# Altium PCB Beetech Metro Shield 1.1.PcbDoc
Units mm, origin at the board's own origin, x right, y up, seen from the top; angles counter-clockwise.
Board outline 68 x 53.53 mm, 2 copper layers (Top Layer, Bottom Layer), stack 1.671 mm thick; 29 components, 25 nets, 125 pads, 27 vias.
Unrouted connection lines stored in the file: 80.
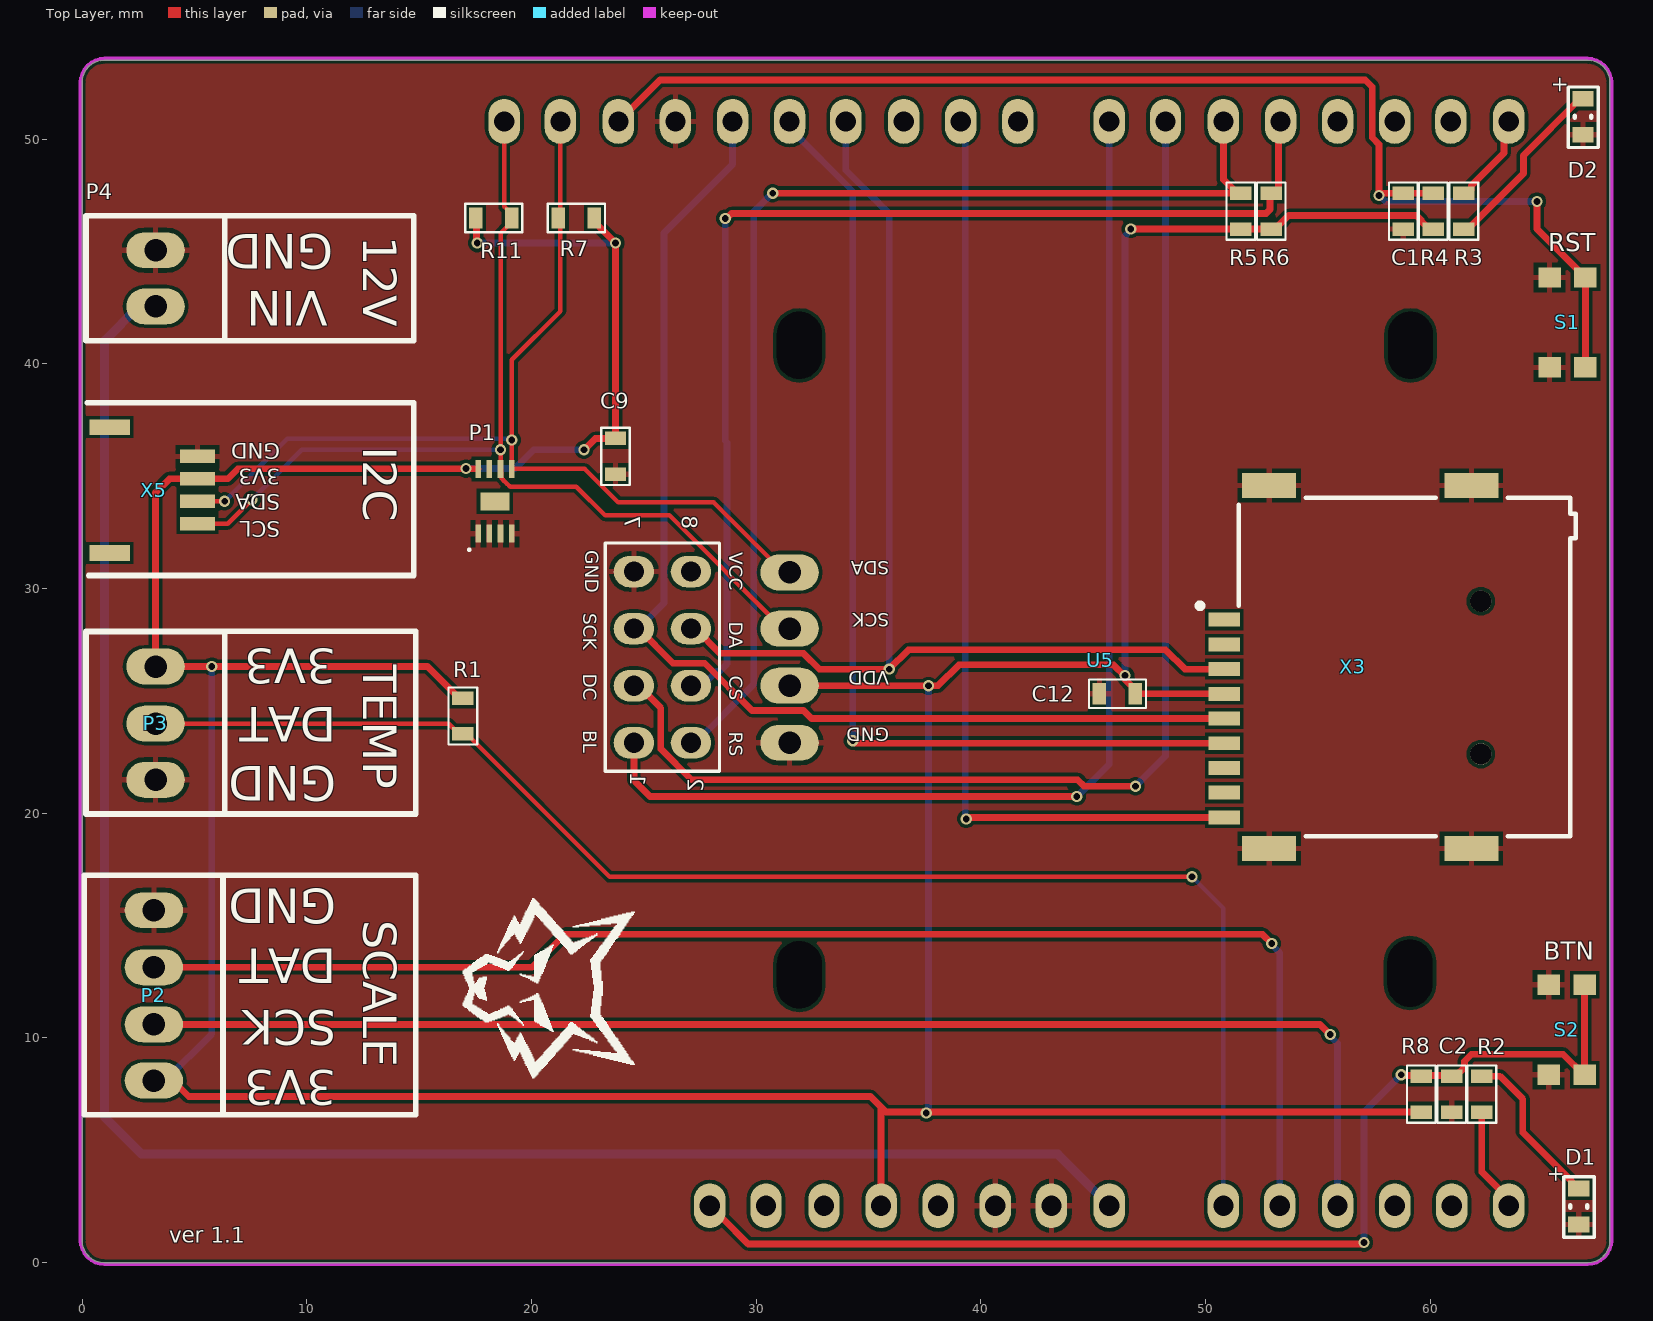
[diagram p0: Top Layer view]
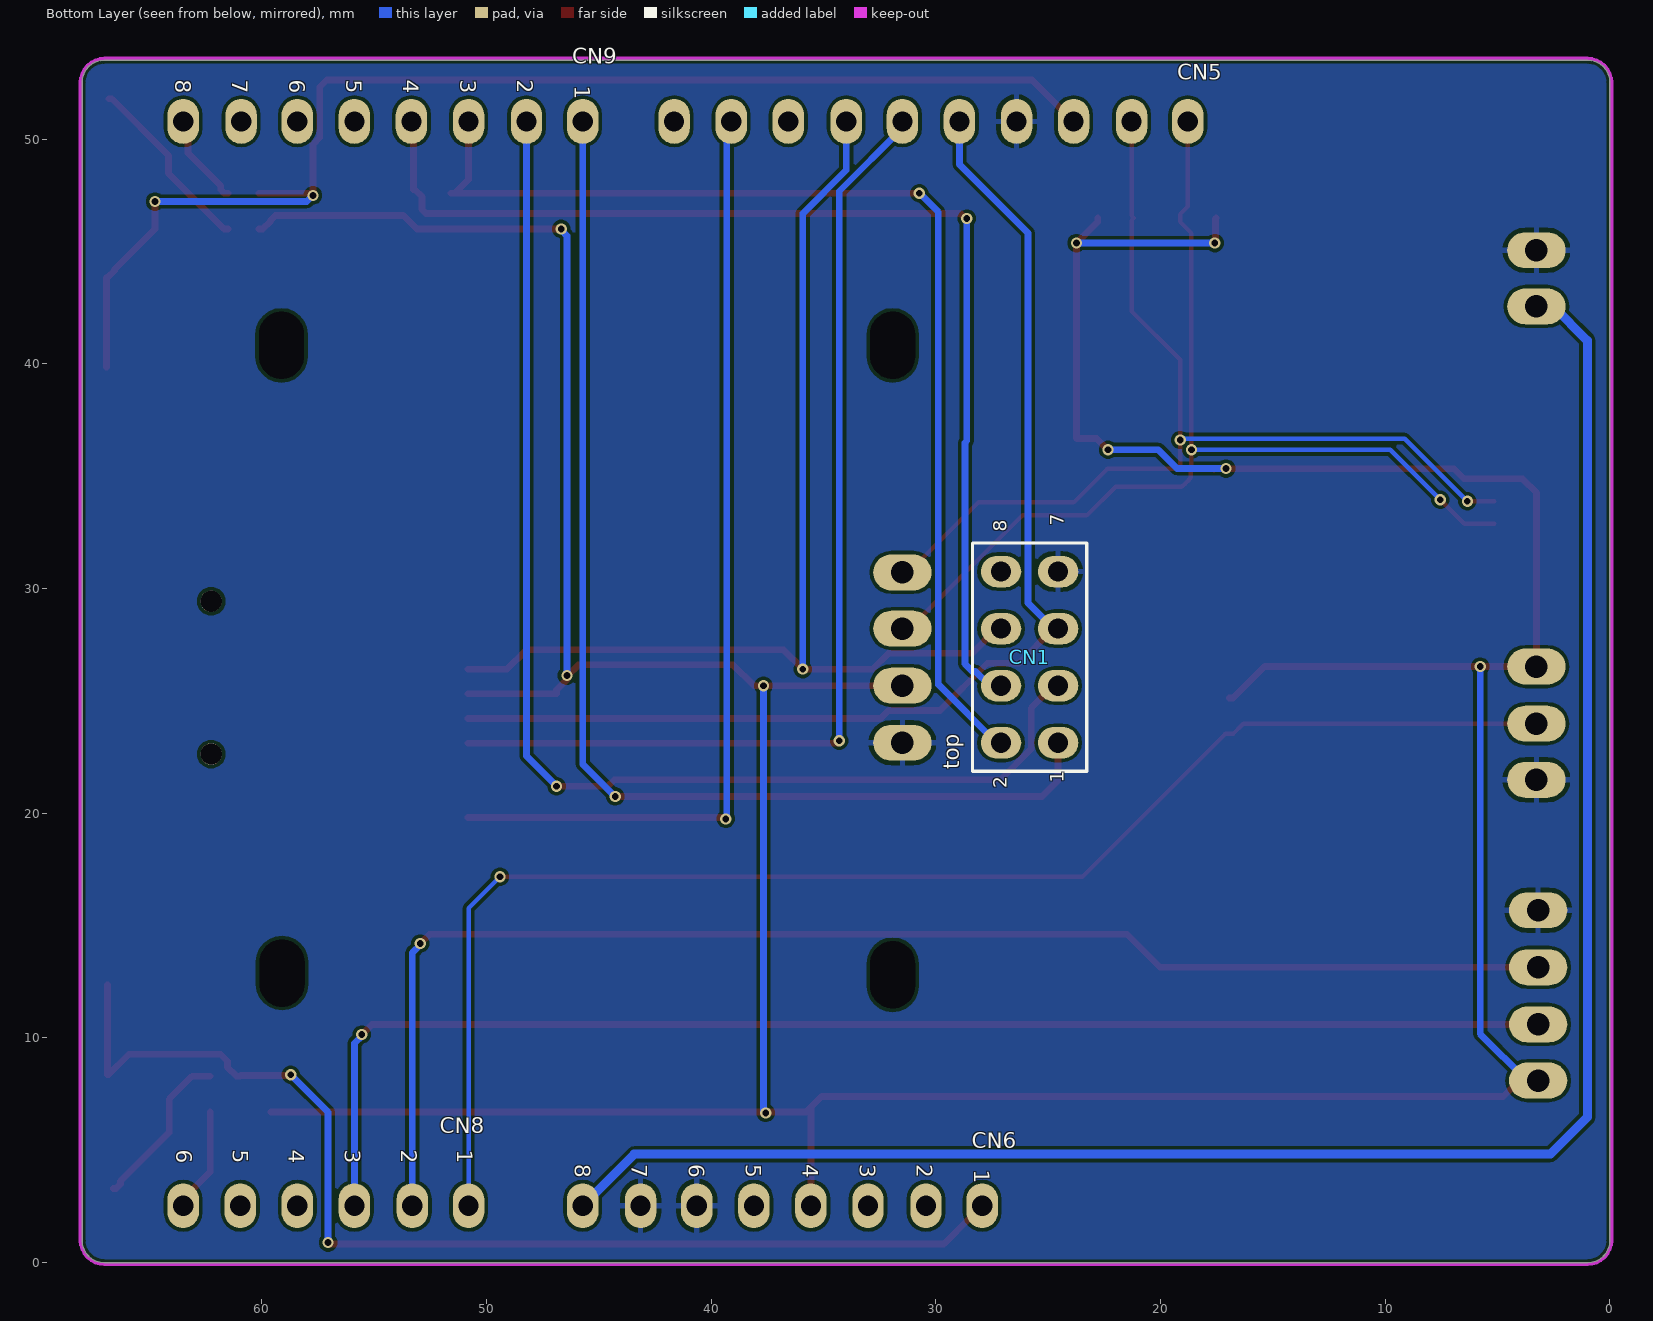
[diagram p1: Bottom Layer view, seen from below]
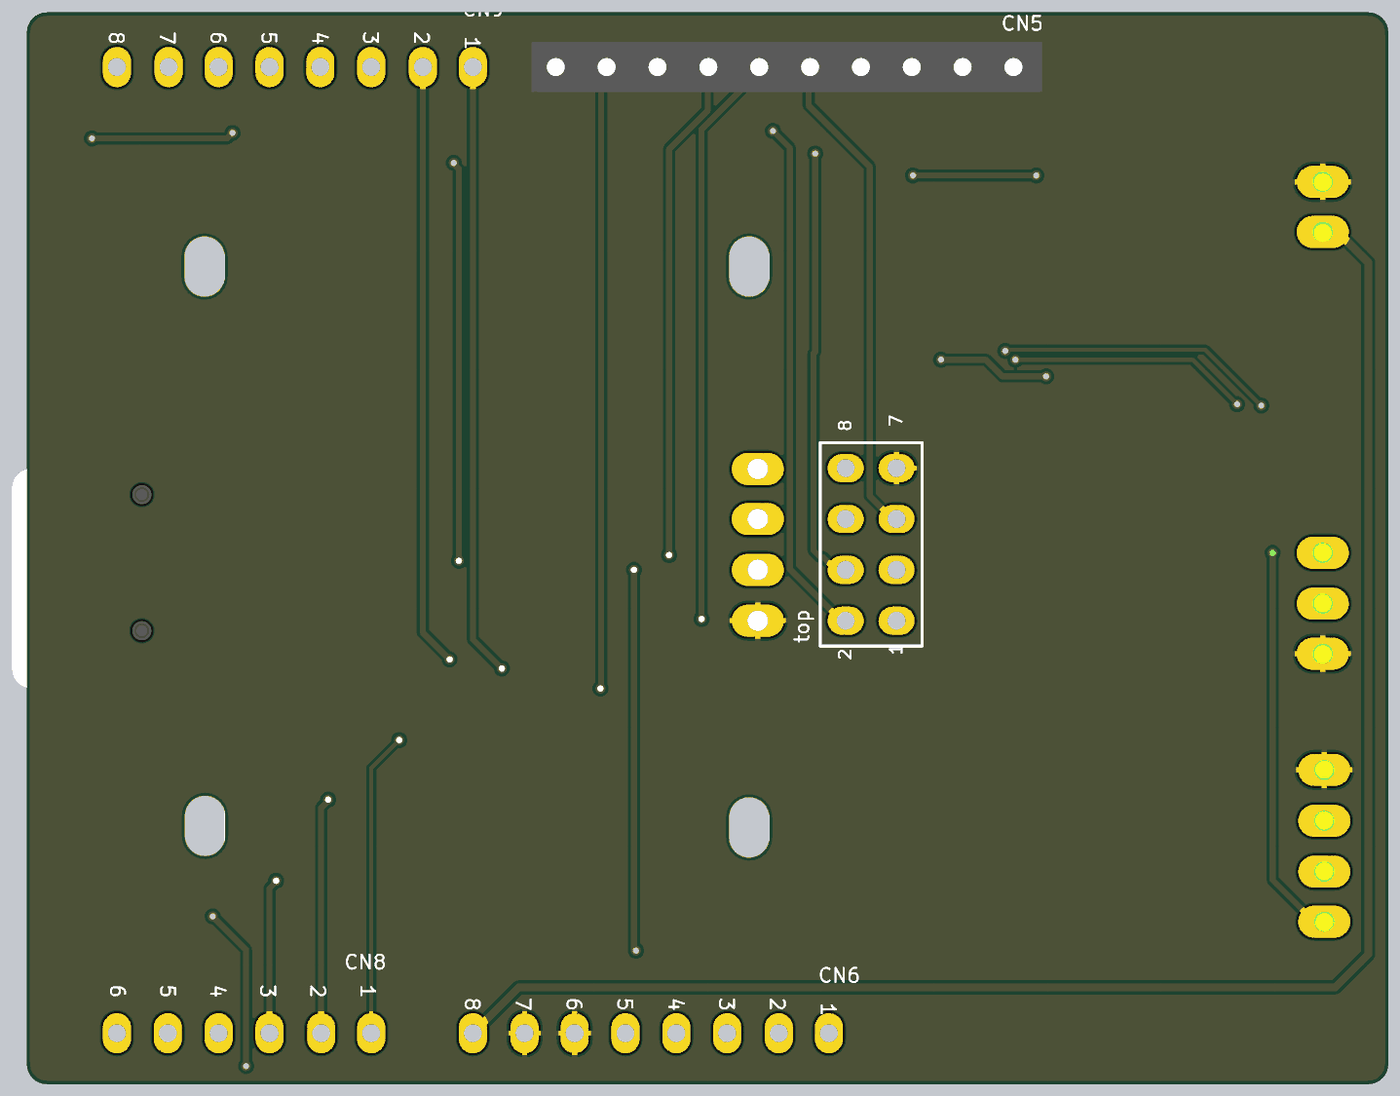
[diagram p2: 3D render of the assembled board from below, using the file's embedded part models]

## Layer stack, top to bottom
Top Solder: solder mask 0.0102, Solder Resist, Dk 3.5
Top Layer: signal copper 0.0356
Dielectric1: core 1.6, FR-4, Dk 4.8
Bottom Layer: signal copper 0.0356
Bottom Solder: solder mask 0.0102, Solder Resist, Dk 3.5

## Board outline
67,53.522 1,53.522 0.805,53.503 0.617,53.446 0.444,53.354 0.293,53.229 0.169,53.078 0.076,52.905 0.019,52.717 0,52.522 0,0.992 0.019,0.797 0.076,0.61 0.169,0.437 0.293,0.285 0.444,0.161 0.617,0.068 0.805,0.012 1,-0.008 67,-0.008 67.195,0.012 67.383,0.068 67.556,0.161 67.707,0.285 67.831,0.437 67.924,0.61 67.981,0.797 68,0.992 68,52.522 67.981,52.717 67.924,52.905 67.831,53.078 67.707,53.229 67.556,53.354 67.383,53.446 67.195,53.503

## Design rules (kind name [scope] priority, off if disabled: settings)
Clearance [All] p1: gap=0.15 ignorepadtopadclearanceinfootprint=FALSE
ComponentClearance [All] p1: gap=0 collisioncheckmode=3 verticalgap=0 showdistances=FALSE
FabricationTestPointUsage [All] p1 off: valid=0 allowmultiple=FALSE
FabricationTestpoint [All] p1 off: side=3 testpointundercomponent=TRUE minsize=1.016 maxsize=2.54 preferedsize=1.524 minholesize=0 maxholesize=1.016 preferedholesize=0.813 testpointgrid=0.025 allowsidetop=TRUE allowsidebottom=TRUE usegrid=TRUE gridtolerance=0
HoleSize [All] p1: absolutevalues=TRUE maxlimit=3.81 minlimit=0.025 maxpercent=80.000 minpercent=20.000
HoleToHoleClearance [All] p1: gap=0 allowstackedmicrovias=TRUE
MinimumSolderMaskSliver [All] p1: minsoldermaskwidth=0
PolygonConnect [InNet('VCC 3.3V')] p1: connectstyle=Direct reliefconductorwidth=0.254 reliefentries=4 polygonreliefangle="90 Angle" airgapwidth=0.254
PolygonConnect PolygonConnect_1 [InNet('GND')] p2: thpad.connectstyle=Relief thpad.reliefconductorwidth=0.254 thpad.reliefentries=4 thpad.polygonreliefangle="90 Angle" thpad.airgapwidth=0.2 smdpad.connectstyle=Relief smdpad.reliefconductorwidth=0.254 smdpad.reliefentries=4 smdpad.polygonreliefangle="90 Angle" smdpad.airgapwidth=0.2 via.connectstyle=Direct via.reliefconductorwidth=0.254 via.reliefentries=4 via.polygonreliefangle="90 Angle" via.airgapwidth=0.2
RoutingVias [All] p1: holewidth=0.3 width=0.5 viastyle="Through Hole" minholewidth=0.2 minwidth=0.4 maxholewidth=1.2 maxwidth=2 useviatemplates=TRUE viatemplateguid#1={3DB4D02C-F2AA-4D96-93EA-058B72C6274F} viatemplateguid#2={7253A52D-AA54-4A84-B513-F050F2263B0A} viatemplatename#1=v50h30m0mx0 viatemplatename#2=v50h30m50mx0
SilkToSilkClearance [All] p1: silktosilkclearance=0.152
SilkToSolderMaskClearance [IsPad] p1: minsilkscreentomaskgap=0 clearancetoexposedcopper=TRUE
SolderMaskExpansion [All] p1: expansion=0.102 istentingtop=FALSE
SupplyNets "Schematic Supply Nets_7" [InNet('VIN')] p1: voltage=0.000
SupplyNets "Schematic Supply Nets_5" [InNet('3V3')] p2: voltage=0.000
SupplyNets "Schematic Supply Nets" [InNet('GND')] p3: voltage=0.000
Width [All] p1: maxlimit=5.08 minlimit=0.01 preferedwidth=0.305 minimp=50.000000 maximp=50.000000 favimp=50.000000
22 further rules are at their usual default settings.

## Components (designator, comment, footprint, x,y, rotation, side; value= is the part's Value field where it differs from the comment)
C1 "100nF 0603" "CAP 0603 - OUTLINE" 58.8,46.8 r90 top value=100nF
C2 "100nF 0603" "CAP 0603 - OUTLINE" 60.96,7.5 r90 top value=100nF
C9 "10uF 0603" "CAP 0603 - OUTLINE" 23.739,35.884 r90 top value=10uF
C12 "10uF 0603" "CAP 0603 - OUTLINE" 46.082,25.315 r0 top value=10uF
CN1 "4 X 2  Header" "4 x 2 2.54mm - no Connector" 24.56,23.138 r90 bottom
CN5 "10-Pin Stiftleiste 10x1 2.54 Low Profile" "10PIN - III" 18.79,50.792 r270 bottom locked
CN6 "8-Pin Stiftleiste 8x1 2.54 Low Profile" "8 PIN - Stiftleiste" 27.94,2.532 r270 bottom locked
CN8 "6-PiN" 6PIN 50.8,2.532 r270 bottom locked
CN9 "8-Pin Stiftleiste 8x1 2.54 Low Profile" "8 PIN - Stiftleiste" 45.72,50.792 r270 bottom locked
D1 "LED Diode SMD LOW CURRENT" "LED SMD 0603 FOOTPRINT" 66.611,2.5 r270 top
D2 "LED Diode SMD LOW CURRENT" "LED SMD 0603 FOOTPRINT" 66.8,51 r270 top
P1 "EEPROM CAT24C512HU5IGT3" "UDFN8 3.0x2.0 CAT24C512HU5IGT3" 18.375,33.884 r90 top
P2 "4-Pin Right Angle Housing" "4PIN - RND 205-EK254-2.54-04P" 3.195,8.104 r180 top
P3 "3-Pin Right Angle Housing" "3PIN - RND 205-EK254-2.54-03P" 3.271,21.49 r180 top
P4 "2-Pin Right Angle Housing" "2PIN - RND 205-EK254-2.54-02P" 3.271,42.558 r180 top
R1 "4.7k Ohm 0603" "RES 0603 FOOTPRINT - OUTLINE" 16.948,24.329 r90 top value=4.7k
R2 "330 Ohm 0603" "RES 0603 FOOTPRINT - OUTLINE" 62.3,7.5 r270 top value=330
R3 "750 Ohm 0603" "RES 0603 FOOTPRINT - OUTLINE" 61.5,46.8 r90 top value=750
R4 "47k Ohm 0603" "RES 0603 FOOTPRINT - OUTLINE" 60.137,46.8 r90 top value=47k
R5 "47k Ohm 0603" "RES 0603 FOOTPRINT - OUTLINE" 51.575,46.8 r270 top value=47k
R6 "47k Ohm 0603" "RES 0603 FOOTPRINT - OUTLINE" 52.925,46.8 r270 top value=47k
R7 "10k Ohm 0603" "RES 0603 FOOTPRINT - OUTLINE" 22,46.493 r0 top value=10k
R8 "47k Ohm 0603" "RES 0603 FOOTPRINT - OUTLINE" 59.6,7.5 r90 top value=47k
R11 "10k Ohm 0603" "RES 0603 FOOTPRINT - OUTLINE" 18.325,46.493 r180 top value=10k
S1 "Taster Print_SMD_2" "Taster Print - SMD - KMR241G LFS" 66.111,41.846 r90 top
S2 "Taster Print_SMD_2" "Taster Print - SMD - KMR241G LFS" 66.073,10.366 r90 top
U5 "OLED I2C 1.3 128x64" "OLED 1.3 128x64 I2C" 31.49,30.718 r0 top locked
X3 "SD micro Card Holder_3" "SD CARD HOLDER - MICRO - 3 - SD CARD INSERTED" 62.255,26.035 r90 top locked
X5 "4-Pin" "QWIIC JST CONNECTOR - SMD 4-PIN" 5.139,34.384 r270 top

## Footprints (in the part's own frame and the unit in brackets; to place one, negate y for a bottom-side part, rotate by r counter-clockwise, add the part's x,y. Pads: shape width x height; smd on the part's side, far side on the other; paste and mask are expansions set on the pad)
"2PIN - RND 205-EK254-2.54-02P" [mm] "RND 205-EK254-2.54-02P"
  oval 2.6x1.6 hole 1: 1(0,0) 2(0,-2.5)
  silkscreen extent -3.07,-4.04 3.1,1.52, body extent -3.1,-3.99 3.1,1.55, height 8.51
"3PIN - RND 205-EK254-2.54-03P" [mm] "RND 205-EK254-2.54-03P"
  oval 2.6x1.6 hole 1: 1(0,0) 2(0,-2.5) 3(0,-5.04)
  silkscreen extent -3.07,-6.6 3.1,1.52, body extent -3.1,-6.55 3.1,1.53, height 8.51
"4 x 2 2.54mm - no Connector" [mm] "4 x 2 2.54mm"
  oval 1.4x1.8 hole 0.9: 1(0,0) 2(0,2.54) 3(2.54,0) 4(2.54,2.54) 5(5.08,0) 6(5.08,2.54) 7(7.62,0) 8(7.62,2.54)
  silkscreen extent -1.27,-1.27 8.89,3.81
"4PIN - RND 205-EK254-2.54-04P" [mm] "RND 205-EK254-2.54-04P"
  oval 2.6x1.6 hole 1: 1(0,0) 2(0,-2.5) 3(0,-5.04) 4(0,-7.58)
  silkscreen extent -3.07,-9.14 3.1,1.52, body extent -3.1,-9.1 3.1,1.52, height 8.51
6PIN [mm]
  oval 2x1.4 hole 0.9: 1(0,0) 2(0,-2.5) 3(0,-5.08) 4(0,-7.62) 5(0,-10.16) 6(0,-12.7)
"8 PIN - Stiftleiste" [mm] "2212S-08SG-85 -  Board-to-Board-Steckve61300811021 -  Board-to-Board-Steckverbinder, abgewinkelt, 2.54 mm, 8 Kontakt(e), Stiftleiste, Baureihe WR-PHD rbinder, 2.54 mm, 8 Kontakt(e), Buchse, Baureihe 2212S, Durchsteckmontage"
  oval 2x1.4 hole 0.9: 1(0,0) 2(0,-2.5) 3(0,-5.08) 4(0,-7.62) 5(0,-10.16) 6(0,-12.7) 7(0,-15.2) 8(0,-17.78)
  body extent -1.25,-18.99 1.25,1.51, height 8
"10PIN - III" [mm]
  oval 2x1.4 hole 0.9: 1(0,0) 2(0,-2.5) 3(0,-5.08) 4(0,-7.62) 5(0,-10.16) 6(0,-12.7) 7(0,-15.2) 8(0,-17.78) 9(0,-20.32) 10(0,-22.86)
  body extent -1.25,-24 1.25,1.5, height 8
"CAP 0603 - OUTLINE" [mm] "CAP 0603"
  rect 0.6x0.95 smd: 1(-0.8,0) 2(0.8,0)
  silkscreen extent -1.27,-0.64 1.27,0.64, body extent -0.8,-0.4 0.8,0.4, height 0.8
"LED SMD 0603 FOOTPRINT" [mm] "Chip Diode, 2-Leads, Body 1.60x0.80mm, IPC Medium Density"
  rect 0.7x0.95 smd: 1(-0.8,0) 2(0.8,0)
  silkscreen extent -1.32,-0.66 1.37,0.69, body extent -0.8,-0.4 0.8,0.4, height 0.35
"OLED 1.3 128x64 I2C" [mm] "OLED 1.3 128x64 I2C"
  oval 2.6x1.6 hole 1: 1(0,-7.58) 2(0,-5.04) 3(0,-2.5) 4(0,0)
  rrect50% 1x1 hole 2 slot 3 at 90 deg: 5(0.432,10.109) 6(27.635,10.109) 7(27.61,-17.831) 8(0.432,-17.907)
  body extent -1.45,-21.64 29.55,13.86, height 8.6
"QWIIC JST CONNECTOR - SMD 4-PIN" [mm] "QWIIC JST CONNECTOR - SMD 4-PIN"
  rect 0.7x1.8 smd: 0(-2.8,-3.9) 0(2.8,-3.9)
  rect 0.6x1.55 smd: 1(1.5,0) 2(0.5,0) 3(-0.5,0) 4(-1.5,0)
  body extent -3.03,-4.73 2.97,0.22, height 2.96
"RES 0603 FOOTPRINT - OUTLINE" [mm] "RES 0603 FOOTPRINT"
  rect 0.6x0.95 smd: 1(-0.8,0) 2(0.8,0)
  silkscreen extent -1.27,-0.64 1.27,0.64, body extent -0.8,-0.4 0.8,0.4, height 0.8
"SD CARD HOLDER - MICRO - 3 - SD CARD INSERTED" [mm] "micro SD Card holder, Molex Part Number:    / MEM2075-00-140-01-A"
  rect 0.62x1.4 smd: 1(2.58,11.42) 2(1.48,11.42) 3(0.38,11.42) 4(-0.72,11.42) 5(-1.82,11.42) 6(-2.92,11.42) 7(-4.02,11.42) 8(-5.12,11.42) 10(-6.22,11.42)
  rect 1.1x2.4 smd: 20(-7.6,0.42) 20(-7.6,9.42) 20(8.55,0.42) 20(8.55,9.42)
  round 0.95 hole 0.95 unplated: ""(-3.4,0) ""(3.4,0)
  silkscreen extent -7.05,-4.23 8,12.62, body extent -7.74,-6.5 8.7,11.6, height 1.46
"Taster Print - SMD - KMR241G LFS" [mm] "http://ch.farnell.com/c-k-components/kmr241g-lfs/taster-smd-4n/dp/1437637"
  rect 0.9x1 smd: 1(-2,0.8) 2(-2,-0.8) 10(2,0.8) 20(2,-0.8)
  body extent -2.3,-1.4 2.3,1.4, height 1.93
"UDFN8 3.0x2.0 CAT24C512HU5IGT3" [mm] "CAT24C512HU5IGT3"
  rect 0.8x0.25 smd: 1(-1.44,0.75) 2(-1.44,0.25) 3(-1.44,-0.25) 4(-1.44,-0.75) 5(1.44,-0.75) 6(1.44,-0.25) 7(1.44,0.25) 8(1.44,0.75)
  rect 0.8x1.3 smd: 9(0,0)
  silkscreen extent -2.21,1.09 -2.11,1.19, body extent -1.5,-1 1.5,1, height 0.55

## Part data
C1 C2 C9 C12: "C CERAMIC SMD", Bezeichnung="C SMD", Haendler=Mouser, housing/footprint=0603, Umax=10V
  C1 C2: Haendler Nr=710-885012206020, Hersteller=Würth, Hersteller Nr=885012206020, Preis (CHF)=0.05
  C9 C12: Dielektrikum=X5R, Haendler Nr=810-C1608X5R1A106K, Hersteller=TDK, Hersteller Nr=C1608X5R1A106K080AC, Preis (CHF)=0.5
CN5: "Low Profile 10-Pin Stiftleiste 10x1 2.54 Low Profile", Haendler=Mouser, Haendler Nr=200-TLW11006GS, Hersteller=Samtec, Hersteller Nr=TLW-110-06-G-S, Preis (CHF)=2.2
CN6 CN9: "Low Profile 8-Pin Stiftleiste 8x1 2.54", Haendler=Mouser, Haendler2=Farnell, Haendler2 Nr=2856894, Haendler Nr=200-TLW10806TS, link=https://www.mouser.ch/Connectors/Headers-Wire-Housings/_/N-ay0lo?P=1ytkls2&Keyword=tlw-108&FS=True, Preis (CHF)=1.06
CN8: "6-Pin", LatestRevisionDate=17-Jul-2002, LatestRevisionNote="Re-released for DXP Platform.", Publisher="Altium Limited"
D1: library part "LED Diode SMD - GREEN - 0603 - 2mA_1", "LED Green APT1608LZGCK", COLOR=GREEN, Forward Voltage=2.65, Haendler=Mouser, Haendler Nr=604-APT1608LZGCK, Hersteller=Knightbright, Hersteller Nr=APT1608LZGCK, If=2mA, link=http://ch.farnell.com/kingbright/kpt-1608lvzgck/led-gr-n-50mcd-525nm-smd/dp/2610409, Preis (CHF)=0.321
D2: library part "LED Diode SMD - RED - 0603 - 2mA_1", "LED Red APT1608LSECKJ3RV", COLOR=RED, Forward Voltage=1.8V, Haendler=Mouser, Haendler Nr=604-APT1608LSECKJ3RV, Hersteller=Knightbright, Hersteller Nr=APT1608LSECKJ3RV, If=2mA, Preis (CHF)=0.6
P2: library part "4-Pin Screw Terminal", "4-Pin", ComponentLink1Description=Mouser, ComponentLink1URL=https://www.mouser.ch/ProductDetail/TE-Connectivity/640453-2?qs=sGAEpiMZZMs%252bGHln7q6pm5E1Eb6qwPl2KIU5TYv3tVY%3d, Haendler=Distrelec, Haendler Nr=301-27-920, Hersteller=RND, Hersteller Nr="RND 205-EK254-2.54-04P", Preis (CHF)=0.60
P3: library part "3-Pin Screw Terminal", "3-Pin", ComponentLink1Description=Mouser, ComponentLink1URL=https://www.mouser.ch/ProductDetail/TE-Connectivity/640453-2?qs=sGAEpiMZZMs%252bGHln7q6pm5E1Eb6qwPl2KIU5TYv3tVY%3d, Haendler=Distrelec, Haendler Nr=301-27-919, Preis (CHF)=0.60
P4: library part "2-Pin Screw Terminal", "2-Pin", ComponentLink1Description=Mouser, ComponentLink1URL=https://www.mouser.ch/ProductDetail/TE-Connectivity/640453-2?qs=sGAEpiMZZMs%252bGHln7q6pm5E1Eb6qwPl2KIU5TYv3tVY%3d, Haendler=Distrelec, Haendler Nr=301-27-918, Hersteller="RND 205-EK254-2.54-02P", Preis (CHF)=0.60
R1 R2 R3 R4 R5 R6 R7 R8 R11: "R SMD", Bezeichnung="R SMD", Haendler=Mouser, housing/footprint=0603
  R1: Haendler Nr=755-ESR03EZPF4701, Preis (CHF)=0.01
  R2: Haendler Nr=603-RC0603FR-07330RL, Hersteller=YAGEO, Hersteller Nr=RC0603FR-07330RL, Preis (CHF)=0.01
  R3: Haendler2=Farnell, Haendler2 Nr=2059597, Haendler Nr=71-CRCW0603750RFKEAH, Hersteller=Panasonic, Preis (CHF)=0.0123
  R4 R5 R6 R8: Haendler Nr=603-AC0603FR-0747KL, Hersteller=Yageo, Hersteller Nr=AC0603FR-0747KL, Preis (CHF)=0.01
  R7 R11: Haendler Nr=603-AC0603FR-0710KL, Hersteller=Yageo, Hersteller Nr=AC0603FR-0710KL, Preis (CHF)=0.01
S1 S2: "Taster", Haendler=Mouser, Haendler2=Farnell, Haendler2 Nr=1437637, Haendler Nr=611-KMR241GLFS, Hersteller=C&K, Hersteller Nr="KMR241G LFS", link=http://ch.farnell.com/c-k-components/kmr241g-lfs/taster-smd-4n/dp/1437637, Link Hersteller=http://www.ckswitches.com/products/switches/product-details/Tactile/KMR2/KMR241NGLFS/, Preis (CHF)=0.5
U5: "SSD1306 I2C", Chip="SSD1306 I2C", Haendler=Aliexpress, Haendler Nr="OLED I2C 128x64", link=https://de.aliexpress.com/item/1005008365029314.html?gatewayAdapt=glo2deu#nav-specification, Preis (CHF)=2
X3: "SD micro Card  Holder", Haendler=Mouser, Haendler2=Digikey, Haendler2 Nr=2073-MEM2075-00-140-01-ATR-ND, Haendler Nr=640-MEM20750014001A, Hersteller=GCT, Hersteller Nr=MEM2075-00-140-01-A, Preis (CHF)=1.6
X5: library part "4-Pin QWIIC JST CONNECTOR - SMD 4_1", "QWIIC JST CONNECTOR - SMD 4-PIN", Haendler=Mouser, Haendler2=Digikey, Haendler2 Nr=455-SM04B-SRSS-TBCT-ND, Haendler2 Nr 2=455-SM04B-SRSS-TBCT-ND, Haendler Nr=306-SM04BSRSSTBLFSN, Hersteller=Molex, Hersteller Nr=SM04B-SRSS-TB, link=https://cdn-learn.adafruit.com/downloads/pdf/introducing-adafruit-stemma-qt.pdf?timestamp=1629187570, Preis (CHF)=0.5
CN1: Haendler=Mouser, Haendler Nr=200-SSQ10403TD, Hersteller=Samtec, Hersteller Nr=SSQ-104-03-T-D, Preis (CHF)=1.5
P1: Datasheet=https://www.mouser.ch/ProductDetail/onsemi/CAT24C512HU5IGT3?qs=5C9Q4QJFsuOiuCBGwG%2FnpA%3D%3D, Haendler=Mouser, Haendler Nr=863-CAT24C512HU5IGT3, Hersteller="ON SEMICONDUCTOR", Hersteller Nr=CAT24C512HU5IGT3, Preis (CHF)=0.8

## Via types
v1: diameter 0.5, hole 0.3, Top Layer to Bottom Layer, tented both sides, 27 vias

## Nets (pads, with @x,y where several pads share a name; then routed paths per layer and width w, separated by ;. In a path a pad name is that pad's centre, name@x,y a point inside that pad or via, vN(x,y) a via of type N, cw(c..) or ccw(c..) an arc to the next point about the centre after c; other vN are vias at no path point)
3V3: C9.2 C12.2 CN6.4 P1.8 P2.1 P3.3 R1.2 R4.1 R5.2 R6.2 R7.2 R8.1 R11.2 U5.2 X3.4 X5.3 | length 216.1
  Top Layer w0.3: P2.1 4.035,8.104 4.749,7.39 35.095,7.39 35.56,6.924 ; v1(5.775,26.53) v1@5.7,26.53 ; R1.2 16.773,25.129 15.373,26.53 v1@5.7,26.53 ; R11.2 17.554,46.464 17.554,45.408 v1(17.583,45.379) ; P1.8 17.616,35.334 6.934,35.334 6.484,34.884 X5.3 3.884,34.884 3.271,34.271 P3.3 v1@5.7,26.53 ; v1(22.335,36.175) 22.844,36.684 C9.2 v1(23.739,45.379) 22.8,46.318 R7.2 ; U5.2 v1(37.675,25.678) 38.1,25.678 39.029,26.607 45.908,26.607 46.383,26.131 v1(46.422,26.131) ; CN6.4 35.56,6.924 ; v1@46.422,25.95 46.882,25.49 C12.2 X3.4 ; v1(46.675,46.007) 46.682,46 R5.2 R6.2 53.1,46 53.7,46.6 59.399,46.6 59.6,46.399 59.6,46.362 59.962,46 R4.1 ; R8.1 35.784,6.7 35.56,6.924
  Bottom Layer w0.3: P2.1 3.695,8.104 5.775,10.184 v1(5.775,26.53) ; v1(17.086,35.343) 19.268,35.343 20.1,36.175 v1(22.335,36.175) ; v1(17.583,45.379) v1(23.739,45.379) ; v1(37.575,6.66) 37.675,6.76 v1(37.675,25.678) ; v1(46.422,26.131) 46.422,45.7 46.675,45.953 v1(46.675,46.007)
BL: CN1.1 CN9.1 | length 52.3
  Top Layer w0.3: CN1.1 24.56,21.465 25.275,20.75 v1(44.275,20.75)
  Bottom Layer w0.3: v1(44.275,20.75) 45.72,22.195 CN9.1
BUTTON: C2.2 CN6.1 R8.2 S2.2 S2.20 | length 51.1
  Top Layer w0.3: CN6.1 CN6.1 28.448,2.022 28.45,2.022 29.647,0.825 56.975,0.825 57.045,0.895 v1(57.05,0.895) ; v1(58.717,8.366) 58.75,8.333 60.927,8.333 C2.2 61.135,8.3 61.525,8.69 61.525,8.965 61.835,9.275 65.913,9.275 66.823,8.366 S2.2 S2.20
  Bottom Layer w0.3: v1(57.05,0.895) 57.05,6.699 v1(58.717,8.366)
"CARD DETECT": CN5.9 X3.10 | length 42.7
  Top Layer w0.3: v1(39.35,19.75) 39.425,19.75 39.49,19.815 X3.10
  Bottom Layer w0.3: CN5.9 39.312,50.591 39.312,19.788 v1(39.35,19.75)
CS: CN1.4 CN9.4 R6.1 | length 50.4
  Top Layer w0.3: v1(28.624,46.468) 28.678,46.468 28.907,46.697 52.7,46.697 52.875,46.872 52.875,47.45 53.175,47.75 53.25,47.75 53.25,50.702 CN9.4
  Bottom Layer w0.3: CN1.4 27.598,25.678 28.234,26.314 28.37,26.314 28.707,26.651 28.707,36.491 28.624,36.574 v1(28.624,46.468)
D/C: CN1.3 CN9.2 | length 55.4
  Top Layer w0.3: CN1.3 24.76,25.678 25.76,24.678 25.76,22.864 27.134,21.49 44.313,21.49 44.597,21.206 v1(46.882,21.206)
  Bottom Layer w0.3: v1(46.882,21.206) 48.22,22.544 CN9.2
DAT_SCALE: CN8.2 P2.3 | length 62.3
  Top Layer w0.3: P2.3 20.015,13.144 21.482,14.611 52.539,14.611 v1(52.95,14.2)
  Bottom Layer w0.3: v1(52.95,14.2) 52.95,14.146 53.3,13.796 CN8.2
DAT_TEMP: CN8.1 P3.2 R1.1 | length 64.2
  Top Layer w0.2: P3.2 16.313,23.99 16.773,23.529 R1.1 17.123,23.529 23.478,17.175 v1(49.4,17.175)
  Bottom Layer w0.2: v1(49.4,17.175) 50.8,15.775 CN8.1
"ESP32 RESET": C1.2 CN5.3 R4.2 S1.2 S1.20 | length 57.3
  Top Layer w0.3: CN5.3 23.87,50.795 24.378,51.303 24.38,51.303 25.718,52.64 57.11,52.64 57.42,52.33 57.42,50.078 57.725,49.773 v1(57.725,47.5) 57.779,47.5 57.879,47.6 C1.2 R4.2 ; v1(64.75,47.225) 64.75,46.007 66.561,44.196 66.561,44.146 66.861,43.846 S1.20 S1.2
  Bottom Layer w0.3: v1(57.725,47.5) 58,47.225 v1(64.75,47.225)
GND: C1.1 C2.1 C9.1 C12.1 CN1.7 CN5.4 CN6.6 CN6.7 D1.2 D2.2 P1.1 P1.2 P1.3 P1.4 P2.4 P3.1 P4.2 S1.1 S1.10 S2.1 S2.10 U5.1 X3.20 X5.4
"LED 1 G": CN8.6 R2.2 | length 4.7
  Top Layer w0.3: R2.2 62.3,4.032 63.5,2.832 CN8.6
"LED 1 R": CN9.8 R3.2 | length 4.1
  Top Layer w0.3: R3.2 61.675,47.6 61.825,47.75 61.825,47.925 63.29,49.39 63.29,50.582 CN9.8
NetD1_1: D1.1 R2.1 | length 7.3
  Top Layer w0.3: R2.1 63.1,8.3 64.125,7.275 64.125,5.786 66.286,3.625 66.286,3.5 66.486,3.3 D1.1
NetD2_1: D2.1 R3.1 | length 8.2
  Top Layer w0.3: R3.1 61.675,46 64.15,48.475 64.15,49.275 66.675,51.8 D2.1
RES: CN1.2 CN9.3 R5.1 | length 50.5
  Top Layer w0.3: v1(30.736,47.6) R5.1 51.4,47.6 50.8,48.2 CN9.3
  Bottom Layer w0.3: CN1.2 27.3,23.138 29.89,25.728 29.89,46.754 v1(30.736,47.6)
"SCK SCALE": CN8.3 P2.2 | length 60.3
  Top Layer w0.3: P2.2 55.096,10.604 v1(55.55,10.15)
  Bottom Layer w0.3: v1(55.55,10.15) 55.55,10.096 55.88,9.766 CN8.3
SCL: CN5.1 P1.6 R11.1 U5.3 X5.1 | length 46.7
  Top Layer w0.2: X5.1 6.484,32.884 v1(7.55,33.95) ; CN5.1 18.79,47.004 19.125,46.668 R11.1 19.125,46.318 18.625,45.819 v1(18.625,36.175) P1.6 18.65,35.299 18.65,34.935 18.75,34.835 18.75,34.821 18.897,34.674 18.911,34.674 19.051,34.534 21.998,34.534 23.274,33.258 26.144,33.258 31.184,28.218 U5.3
  Bottom Layer w0.2: v1(7.55,33.95) 9.775,36.175 v1(18.625,36.175)
SD_CS: X3.2
SDA: CN5.2 P1.5 R7.1 U5.4 X5.2 | length 45.9
  Top Layer w0.2: X5.2 v1(6.345,33.884) ; CN5.2 21.29,46.583 R7.1 21.29,46.403 21.29,42.35 19.125,40.185 v1(19.125,36.613) P1.5 22.371,35.324 23.862,33.833 28.117,33.833 31.232,30.718 U5.4
  Bottom Layer w0.2: v1(6.345,33.884) 9.136,36.675 19.063,36.675 v1(19.125,36.613)
"SPI CS": CN5.8
"SPI MISO": CN5.6 X3.6 | length 45.3
  Top Layer w0.3: v1(34.3,23.225) 34.41,23.115 X3.6
  Bottom Layer w0.3: CN5.6 31.49,50.492 34.3,47.682 v1(34.3,23.225)
"SPI MOSI": CN1.6 CN5.7 X3.3 | length 50.4
  Top Layer w0.3: CN1.6 27.3,28.218 28.4,27.118 32.106,27.118 32.808,26.415 v1(35.922,26.415) 36.782,27.275 48.22,27.275 49.08,26.415 X3.3
  Bottom Layer w0.3: CN5.7 33.99,48.629 35.922,46.697 v1(35.922,26.415)
"SPI SCK": CN1.5 CN5.5 X3.5 | length 52.4
  Top Layer w0.3: CN1.5 24.76,28.218 26.3,26.678 27.714,26.678 29.814,24.578 32.106,24.578 32.468,24.215 X3.5
  Bottom Layer w0.3: CN1.5 24.76,28.218 25.9,29.358 25.9,45.825 28.95,48.875 CN5.5
VCC: CN1.8
VIN: CN6.8 P4.1 | length 83.8
  Bottom Layer w0.4: P4.1 2.524,42.558 1,41.034 1,6.475 2.65,4.825 43.427,4.825 45.229,3.024 45.258,3.024 45.72,2.562 CN6.8
pads on no net: CN5.10 CN6.2 CN6.3 CN6.5 CN8.4 CN8.5 CN9.5 CN9.6 CN9.7 P1.7 P1.9 U5.5 U5.6 U5.7 U5.8 X3. X3.1 X3.7 X3.8 X5.0

## Polygon pours and split planes (outlines as drawn)
GND on Top Layer "GND_L01_P000" (solid, pour order 0): 67,53.522 1,53.522 0.805,53.503 0.617,53.446 0.444,53.354 0.293,53.229 0.169,53.078 0.076,52.905 0.019,52.717 0,52.522 0,0.992 0.019,0.797 0.076,0.61 0.169,0.437 0.293,0.285 0.444,0.161 0.617,0.068 0.805,0.012 1,-0.008 67,-0.008 67.195,0.012 67.383,0.068 67.556,0.161 67.707,0.285 67.831,0.437 67.924,0.61 67.981,0.797 68,0.992 68,52.522 67.981,52.717 67.924,52.905 67.831,53.078 67.707,53.229 67.556,53.354 67.383,53.446 67.195,53.503
GND on Bottom Layer "GND_L02_P001" (solid, pour order 1): 67,53.522 1,53.522 0.805,53.503 0.617,53.446 0.444,53.354 0.293,53.229 0.169,53.078 0.076,52.905 0.019,52.717 0,52.522 0,0.992 0.019,0.797 0.076,0.61 0.169,0.437 0.293,0.285 0.444,0.161 0.617,0.068 0.805,0.012 1,-0.008 67,-0.008 67.195,0.012 67.383,0.068 67.556,0.161 67.707,0.285 67.831,0.437 67.924,0.61 67.981,0.797 68,0.992 68,52.522 67.981,52.717 67.924,52.905 67.831,53.078 67.707,53.229 67.556,53.354 67.383,53.446 67.195,53.503

## Keep-outs
Keep-Out Layer:
  lines w0.15: -0.075,0.985 cw(c0,0.992) -0.075,0.992 ; -0.075,0.985 cw(c0,0.992) -0.075,0.992 ; -0.075,0.985 -0.055,0.79 ; -0.075,0.992 -0.075,52.522 ; -0.075,52.522 cw(c0,52.522) -0.075,52.53 ; -0.075,52.522 cw(c0,52.522) -0.075,52.53 ; -0.075,52.53 -0.055,52.725 ; -0.055,0.79 ccw(c0.019,0.797) -0.053,0.776 ; -0.055,0.79 ccw(c0.019,0.797) -0.053,0.775 ; -0.055,52.725 cw(c0.019,52.717) -0.053,52.739 ; -0.055,52.725 cw(c0.019,52.717) -0.053,52.739 ; -0.053,0.775 cw(c0.019,0.797) -0.053,0.776 ; -0.053,0.775 -0.053,0.775 ; -0.053,0.775 0.004,0.588 ; -0.053,0.776 -0.053,0.775 ; -0.053,52.739 ccw(c0.019,52.717) -0.053,52.739 ; -0.053,52.739 0.004,52.927 ; -0.053,52.739 -0.053,52.739 ; -0.053,52.739 -0.053,52.739 ; 0.004,0.588 ccw(c0.076,0.61) 0.004,0.588 ; 0.004,0.588 ccw(c0.076,0.61) 0.01,0.574 ; 0.004,0.588 0.004,0.588 ; 0.004,0.588 0.004,0.588 ; 0.004,52.927 cw(c0.076,52.905) 0.004,52.927 ; 0.004,52.927 0.004,52.927 ; 0.004,52.927 cw(c0.076,52.905) 0.01,52.94 ; 0.004,52.927 0.004,52.927 ; 0.004,0.588 ccw(c0.076,0.61) 0.01,0.574 ; 0.004,52.927 cw(c0.076,52.905) 0.01,52.94 ; 0.01,0.574 ccw(c0.076,0.61) 0.01,0.574 ; 0.01,0.574 0.01,0.574 ; 0.01,0.574 0.01,0.574 ; 0.01,0.574 0.102,0.402 ; 0.01,52.941 ccw(c0.076,52.905) 0.01,52.94 ; 0.01,52.941 0.102,53.113 ; 0.01,52.94 0.01,52.941 ; 0.01,52.94 0.01,52.94 ; 0.102,0.401 ccw(c0.169,0.437) 0.111,0.389 ; 0.102,0.402 ccw(c0.169,0.437) 0.102,0.401 ; 0.102,0.401 ccw(c0.169,0.437) 0.111,0.389 ; 0.102,0.402 0.102,0.401 ; 0.102,0.401 0.102,0.401 ; 0.102,53.113 cw(c0.169,53.078) 0.111,53.125 ; 0.102,53.113 cw(c0.169,53.078) 0.102,53.113 ; 0.102,53.113 0.102,53.113 ; 0.102,53.113 0.102,53.113 ; 0.102,53.113 cw(c0.169,53.078) 0.111,53.125 ; 0.111,0.389 0.235,0.238 ; 0.111,53.125 0.235,53.277 ; 0.235,0.238 ccw(c0.293,0.285) 0.245,0.227 ; 0.235,0.238 ccw(c0.293,0.285) 0.245,0.227 ; 0.235,53.277 cw(c0.293,53.229) 0.245,53.287 ; 0.235,53.277 cw(c0.293,53.229) 0.245,53.287 ; 0.245,0.227 0.397,0.103 ; 0.245,53.287 0.397,53.412 ; 0.397,0.103 ccw(c0.444,0.161) 0.409,0.095 ; 0.397,0.103 ccw(c0.444,0.161) 0.409,0.095 ; 0.397,53.412 cw(c0.444,53.354) 0.409,53.42 ; 0.397,53.412 cw(c0.444,53.354) 0.409,53.42 ; 0.409,0.095 cw(c0.444,0.161) 0.409,0.095 ; 0.409,0.095 0.582,0.002 ; 0.409,0.095 0.409,0.095 ; 0.409,0.095 0.409,0.095 ; 0.409,53.42 ccw(c0.444,53.354) 0.409,53.42 ; 0.409,53.42 0.582,53.512 ; 0.409,53.42 0.409,53.42 ; 0.409,53.42 0.409,53.42 ; 0.582,0.002 ccw(c0.617,0.068) 0.596,-0.003 ; 0.582,0.002 ccw(c0.617,0.068) 0.582,0.002 ; 0.582,0.002 ccw(c0.617,0.068) 0.595,-0.003 ; 0.582,0.002 0.582,0.002 ; 0.582,0.002 0.582,0.002 ; 0.582,53.512 cw(c0.617,53.446) 0.595,53.518 ; 0.582,53.512 ccw(c0.617,53.446) 0.582,53.512 ; 0.582,53.512 cw(c0.617,53.446) 0.596,53.518 ; 0.582,53.512 0.582,53.512 ; 0.582,53.512 0.582,53.512 ; 0.595,-0.003 ccw(c0.617,0.068) 0.596,-0.003 ; 0.596,-0.003 0.783,-0.06 ; 0.596,-0.003 0.596,-0.003 ; 0.595,-0.003 0.596,-0.003 ; 0.596,53.518 ccw(c0.617,53.446) 0.595,53.518 ; 0.596,53.518 0.783,53.575 ; 0.596,53.518 0.596,53.518 ; 0.595,53.518 0.596,53.518 ; 0.783,-0.06 ccw(c0.805,0.012) 0.798,-0.063 ; 0.783,-0.06 ccw(c0.805,0.012) 0.783,-0.06 ; 0.783,-0.06 ccw(c0.805,0.012) 0.798,-0.063 ; 0.783,-0.06 0.783,-0.06 ; 0.783,-0.06 0.783,-0.06 ; 0.783,53.575 cw(c0.805,53.503) 0.798,53.578 ; 0.783,53.575 ccw(c0.805,53.503) 0.783,53.575 ; 0.783,53.575 cw(c0.805,53.503) 0.798,53.578 ; 0.783,53.575 0.783,53.575 ; 0.783,53.575 0.783,53.575 ; 0.798,-0.063 0.993,-0.082 ; 0.798,53.578 0.993,53.597 ; 0.993,-0.082 ccw(c1,-0.008) 1,-0.083 ; 0.993,-0.082 ccw(c1,-0.008) 1,-0.083 ; 0.993,53.597 cw(c1,53.522) 1,53.597 ; 0.993,53.597 cw(c1,53.522) 1,53.597 ; 1,-0.083 67,-0.083 ; 1,53.597 67,53.597 ; 67,-0.083 ccw(c67,-0.008) 67.007,-0.082 ; 67,-0.083 ccw(c67,-0.008) 67.007,-0.082 ; 67,53.597 cw(c67,53.522) 67.007,53.597 ; 67,53.597 cw(c67,53.522) 67.007,53.597 ; 67.007,-0.082 67.202,-0.063 ; 67.007,53.597 67.202,53.578 ; 67.202,-0.063 ccw(c67.195,0.012) 67.217,-0.06 ; 67.202,-0.063 ccw(c67.195,0.012) 67.217,-0.06 ; 67.202,53.578 cw(c67.195,53.503) 67.217,53.575 ; 67.202,53.578 cw(c67.195,53.503) 67.217,53.575 ; 67.217,-0.06 ccw(c67.195,0.012) 67.217,-0.06 ; 67.217,-0.06 67.404,-0.003 ; 67.217,-0.06 67.217,-0.06 ; 67.217,-0.06 67.217,-0.06 ; 67.217,53.575 ccw(c67.195,53.503) 67.217,53.575 ; 67.217,53.575 67.404,53.518 ; 67.217,53.575 67.217,53.575 ; 67.217,53.575 67.217,53.575 ; 67.404,-0.003 ccw(c67.383,0.068) 67.405,-0.003 ; 67.404,-0.003 ccw(c67.383,0.068) 67.418,0.002 ; 67.404,-0.003 67.405,-0.003 ; 67.404,-0.003 67.404,-0.003 ; 67.404,53.518 cw(c67.383,53.446) 67.418,53.512 ; 67.404,53.518 cw(c67.383,53.446) 67.405,53.518 ; 67.404,53.518 67.405,53.518 ; 67.404,53.518 67.404,53.518 ; 67.405,-0.003 ccw(c67.383,0.068) 67.418,0.002 ; 67.405,53.518 cw(c67.383,53.446) 67.418,53.512 ; 67.418,0.002 ccw(c67.383,0.068) 67.418,0.002 ; 67.418,0.002 67.591,0.095 ; 67.418,0.002 67.418,0.002 ; 67.418,0.002 67.418,0.002 ; 67.418,53.512 ccw(c67.383,53.446) 67.418,53.512 ; 67.418,53.512 67.591,53.42 ; 67.418,53.512 67.418,53.512 ; 67.418,53.512 67.418,53.512 ; 67.591,0.095 ccw(c67.556,0.161) 67.591,0.095 ; 67.591,0.095 67.591,0.095 ; 67.591,0.095 ccw(c67.556,0.161) 67.603,0.103 ; 67.591,0.095 ccw(c67.556,0.161) 67.603,0.103 ; 67.591,0.095 67.591,0.095 ; 67.591,53.42 cw(c67.556,53.354) 67.603,53.412 ; 67.591,53.42 ccw(c67.556,53.354) 67.591,53.42 ; 67.591,53.42 cw(c67.556,53.354) 67.603,53.412 ; 67.591,53.42 67.591,53.42 ; 67.591,53.42 67.591,53.42 ; 67.603,0.103 67.755,0.227 ; 67.603,53.412 67.755,53.287 ; 67.755,0.227 ccw(c67.707,0.285) 67.765,0.238 ; 67.755,0.227 ccw(c67.707,0.285) 67.765,0.238 ; 67.755,53.287 cw(c67.707,53.229) 67.765,53.277 ; 67.755,53.287 cw(c67.707,53.229) 67.765,53.277 ; 67.765,0.238 67.889,0.389 ; 67.765,53.277 67.889,53.125 ; 67.889,0.389 ccw(c67.831,0.437) 67.898,0.401 ; 67.889,0.389 ccw(c67.831,0.437) 67.898,0.401 ; 67.889,53.125 cw(c67.831,53.078) 67.898,53.113 ; 67.889,53.125 cw(c67.831,53.078) 67.898,53.113 ; 67.898,0.401 67.99,0.574 ; 67.898,53.113 67.99,52.94 ; 67.99,0.574 ccw(c67.924,0.61) 67.996,0.588 ; 67.99,0.574 ccw(c67.924,0.61) 67.996,0.588 ; 67.99,52.94 cw(c67.924,52.905) 67.996,52.927 ; 67.99,52.94 cw(c67.924,52.905) 67.996,52.927 ; 67.996,0.588 ccw(c67.924,0.61) 67.996,0.588 ; 67.996,0.588 68.052,0.775 ; 67.996,0.588 67.996,0.588 ; 67.996,0.588 67.996,0.588 ; 67.996,52.927 ccw(c67.924,52.905) 67.996,52.927 ; 67.996,52.927 67.996,52.927 ; 67.996,52.927 68.052,52.739 ; 67.996,52.927 67.996,52.927 ; 68.052,0.775 ccw(c67.981,0.797) 68.053,0.776 ; 68.052,0.775 68.053,0.775 ; 68.053,0.775 ccw(c67.981,0.797) 68.055,0.79 ; 68.053,0.776 ccw(c67.981,0.797) 68.055,0.79 ; 68.053,0.775 68.053,0.776 ; 68.053,52.739 cw(c67.981,52.717) 68.055,52.725 ; 68.053,52.739 ccw(c67.981,52.717) 68.052,52.739 ; 68.053,52.739 cw(c67.981,52.717) 68.055,52.725 ; 68.052,52.739 68.053,52.739 ; 68.053,52.739 68.053,52.739 ; 68.055,0.79 68.075,0.985 ; 68.055,52.725 68.075,52.53 ; 68.075,0.985 ccw(c68,0.992) 68.075,0.992 ; 68.075,0.985 ccw(c68,0.992) 68.075,0.992 ; 68.075,0.992 68.075,52.522 ; 68.075,52.522 ccw(c68,52.522) 68.075,52.53 ; 68.075,52.522 ccw(c68,52.522) 68.075,52.53

## Silkscreen, mask and mechanical layers (free items; w line width, h text height)
Top Overlay:
  drawing of 20 lines, arcs and shapes, not listed
  text "12V" at 12.51,45.682 h1.5 r270
  text "RST" at 65.25,45.024 h0.8
  text "GND" at 8.82,36.461 h0.7 r180
  text "I2C" at 12.51,36.311 h1.5 r270
  text "3V3" at 8.82,35.343 h0.7 r180
  text "SDA" at 8.82,34.2 h0.7 r180
  text "SCL" at 8.82,32.987 h0.7 r180
  text "GND" at 22.4,31.7 h0.6 r270
  text "VCC" at 28.807,31.617 h0.6 r270
  text "SCK" at 22.3,28.893 h0.6 r270
  text "DA" at 28.807,28.515 h0.6 r270
  text "TEMP" at 12.51,26.61 h1.5 r270
  text "DC" at 22.3,26.214 h0.6 r270
  text "CS" at 28.807,26.131 h0.6 r270
  text "BL" at 22.3,23.7 h0.6 r270
  text "RS" at 28.807,23.617 h0.6 r270
  text "SCALE" at 12.51,15.245 h1.5 r270
  text "BTN" at 65.05,13.475 h0.8
  text "ver 1.1" at 3.875,0.89 h0.7

## Text inside footprints (layer, text, board x,y; h text height)
CN1: Bottom Overlay "1" at 24.306,21.36 h0.6 r270; Bottom Overlay "2" at 26.846,21.106 h0.6 r270; Bottom Overlay "top" at 28.957,21.968 h0.7 r270; Bottom Overlay "7" at 24.306,32.79 h0.6 r270; Bottom Overlay "8" at 26.846,32.536 h0.6 r270; Top Overlay "2" at 26.946,20.952 h0.7 r270; Top Overlay "1" at 24.406,21.206 h0.7 r270; Top Overlay "8" at 26.692,32.636 h0.7 r270; Top Overlay "7" at 24.152,32.636 h0.7 r270
CN6: Bottom Overlay "5" at 38.462,4.38 h0.7 r90; Bottom Overlay "4" at 35.922,4.38 h0.7 r90; Bottom Overlay "1" at 28.302,4.126 h0.7 r90; Bottom Overlay "2" at 30.842,4.38 h0.7 r90; Bottom Overlay "3" at 33.382,4.38 h0.7 r90; Bottom Overlay "8" at 46.082,4.38 h0.7 r90; Bottom Overlay "7" at 43.542,4.38 h0.7 r90; Bottom Overlay "6" at 41.002,4.38 h0.7 r90
CN8: Bottom Overlay "5" at 61.3,5.032 h0.7 r90; Bottom Overlay "4" at 58.8,5.032 h0.7 r90; Bottom Overlay "1" at 51.3,5.032 h0.7 r90; Bottom Overlay "2" at 53.8,5.032 h0.7 r90; Bottom Overlay "3" at 56.3,5.032 h0.7 r90; Bottom Overlay "6" at 63.8,5.032 h0.7 r90
CN9: Bottom Overlay "5" at 56.242,52.64 h0.7 r90; Bottom Overlay "4" at 53.702,52.64 h0.7 r90; Bottom Overlay "1" at 46.082,52.386 h0.7 r90; Bottom Overlay "2" at 48.622,52.64 h0.7 r90; Bottom Overlay "3" at 51.162,52.64 h0.7 r90; Bottom Overlay "8" at 63.862,52.64 h0.7 r90; Bottom Overlay "7" at 61.322,52.64 h0.7 r90; Bottom Overlay "6" at 58.782,52.64 h0.7 r90
D1: Top Overlay "+" at 65.291,4.329 h0.7 r270
D2: Top Overlay "+" at 65.479,52.829 h0.7 r270
P2: Top Overlay "3V3" at 11.323,8.572 h1.52 r180; Top Overlay "SCK" at 11.323,11.239 h1.52 r180; Top Overlay "DAT" at 11.323,13.971 h1.52 r180; Top Overlay "GND" at 11.323,16.649 h1.52 r180
P3: Top Overlay "GND" at 11.323,22.085 h1.52 r180; Top Overlay "DAT" at 11.323,24.726 h1.52 r180; Top Overlay "3V3" at 11.323,27.317 h1.52 r180
P4: Top Overlay "VIN" at 10.939,43.236 h1.52 r180; Top Overlay "GND" at 11.189,45.771 h1.52 r180
U5: Top Overlay "GND" at 35.916,23.811 h0.6 r180; Top Overlay "VDD" at 35.916,26.314 h0.6 r180; Top Overlay "SCK" at 35.916,28.893 h0.6 r180; Top Overlay "SDA" at 35.916,31.219 h0.6 r180